# Allegro board CyberBalance.brd
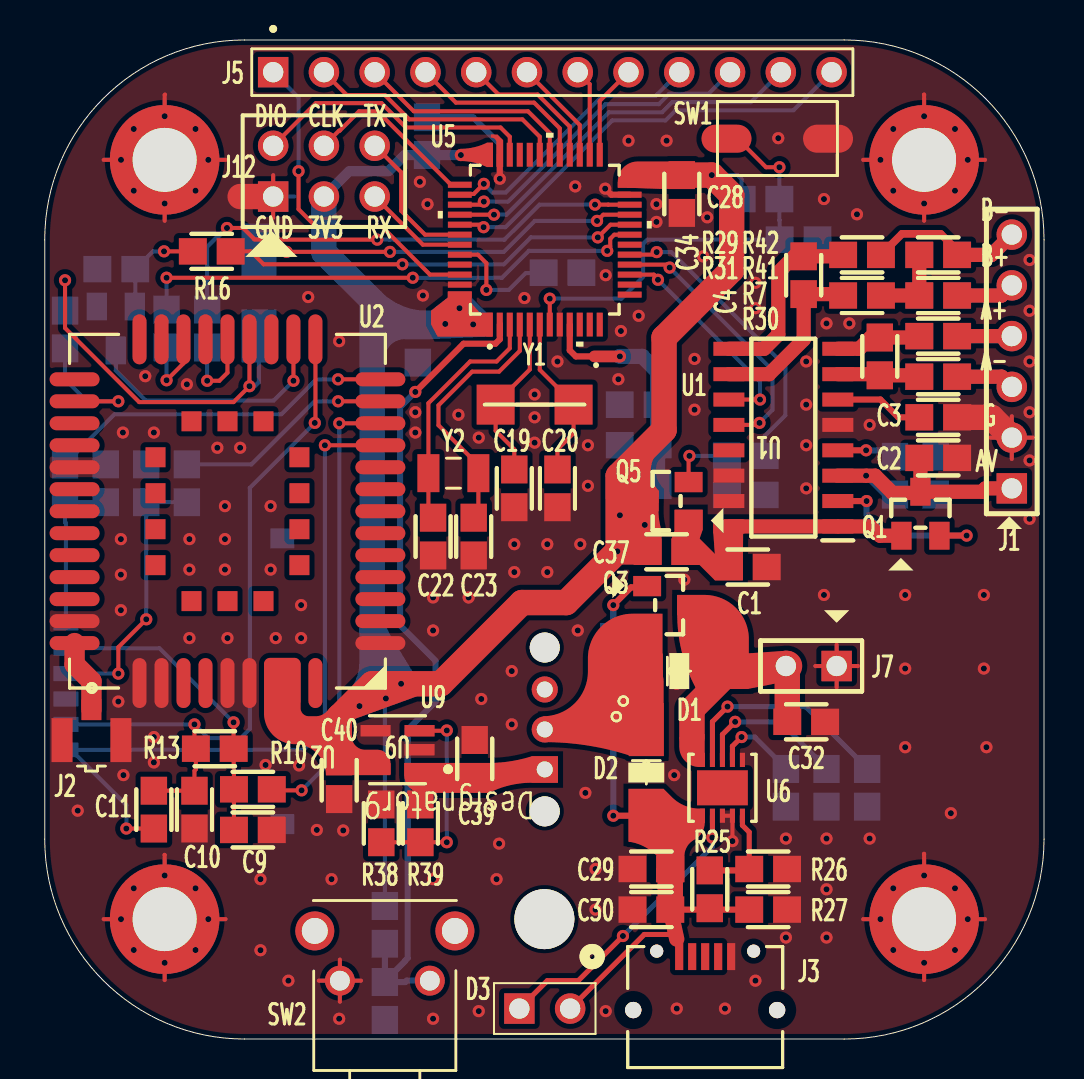
[diagram p0: board, top side]
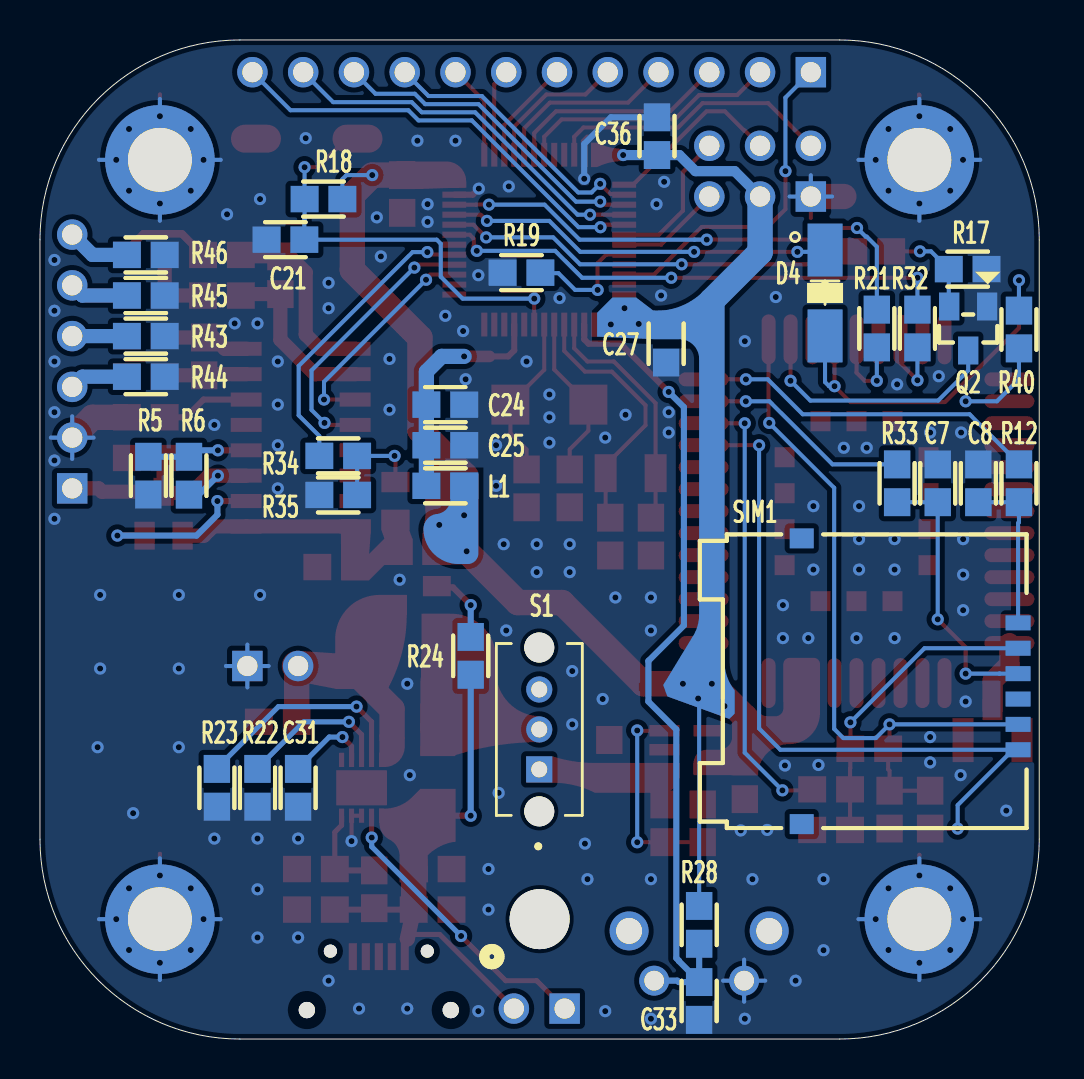
[diagram p1: board, bottom side, seen from below]

Outline 50 x 50 mm; copper layers: TOP, BOTTOM. Coordinates in mm from the lower left corner of the outline.
Outline path: 0,40 0,10 arc(2.93,2.93) 10,0 40,0 arc(47.07,2.93) 50,10 50,40 arc(47.07,47.07) 40,50 10,50 arc(2.93,47.07) 0,40

## Design rules (mm)
constraint set DEFAULT: min track width 0.203

## Placement (name value [footprint] x y rotation side)
C1  10u  [C0805_ROLA]  35.18 23.62 180 top
C2  10u  [C0805_ROLA]  44.7 29.08 180 top
C3  0.1u  [C0805_ROLA]  44.7 31.11 0 top
C4  0.1u  [C0805_ROLA]  41.78 34.16 90 top
C7  30p  [C0805_ROLA]  5.08 27.81 270 bottom
C8  30p  [C0805_ROLA]  3.05 27.81 270 bottom
C9  30p  [C0805_ROLA]  10.41 10.46 180 top
C10  30p  [C0805_ROLA]  7.49 11.48 90 top
C11  100n  [C0805_ROLA]  5.46 11.48 90 top
C19  12p  [C0805_ROLA]  23.5 27.56 270 top
C20  12p  [C0805_ROLA]  25.65 27.56 270 top
C21  1n  [C0805_ROLA]  37.72 40.01 0 bottom
C22  20p  [C0805_ROLA]  19.43 25.15 270 top
C23  20p  [C0805_ROLA]  21.46 25.15 270 top
C24  100n  [C0805_ROLA]  29.72 31.75 0 bottom
C25  1u  [C0805_ROLA]  29.72 29.72 0 bottom
C27  100n  [C0805_ROLA]  18.67 34.8 90 bottom
C28  100n  [C0805_ROLA]  31.88 42.29 90 top
C29  0.1u  [C0805_ROLA]  30.35 8.51 0 top
C30  10u  [C0805_ROLA]  30.35 6.48 0 top
C31  0.1u  [C0805_ROLA]  37.08 12.57 90 bottom
C32  10u  [C0805_ROLA]  38.1 15.88 180 top
C33  1n  [C0805_ROLA]  17.02 1.91 90 bottom
C34  0.1u  [C0805_ROLA]  37.97 38.23 270 top
C36  100n  [C0805_ROLA]  19.13 45.19 270 bottom
C37  100n  [C0805_ROLA]  31.11 24.38 0 top
C39  1u  [C0805_ROLA]  21.51 14.02 90 top
C40  1u  [C0805_ROLA]  14.73 12.95 270 top
D1  D1N5819  [DO214]  31.75 18.41 180 top
D2  D1N5819  [DO214]  30.1 13.34 90 top
D3  RED  [LED_3MM_ROLA]  25.02 1.52 0 top
D4  D1N5819  [DO214]  10.72 37.34 90 bottom
J1  CON6  [HDR_1X6_ROLA]  48.39 27.56 90 top
J2  20279-001E-01  [IPEX_20279-001E-01]  2.34 14.96 90 top
J3  MicroUSB  [ZX62D-B-5P8_30__HIR]  33.05 1.6 0 top
J5  LCD  [TE_103336-5]  25.4 48.39 0 top
J7  BAT  [HDR_1X2_ROLA]  39.62 18.67 180 top
J8  CON1  [MHOLE_32MM_ROLA]  6 6 0 top
J9  CON1  [MHOLE_32MM_ROLA]  44 6 0 top
J10  CON1  [MHOLE_32MM_ROLA]  6 44 0 top
J11  CON1  [MHOLE_32MM_ROLA]  44 44 0 top
J12  CON6A  [HEADER_3X2_100MIL]  11.43 42.16 0 top
L1  Ferrite  [R0805_ROLA]  29.72 27.69 180 bottom
NOREF  -  []  22.5 0.1 0 top
NOREF#2  -  []  15.2 -4.1 0 top
NOREF#3  -  []  29.3 -1.7 0 top
NOREF#4  -  []  0 0.1 0 top
NOREF#5  -  [unnamed#2]  25 6 0 top
NOREF#6  -  []  0 0 90 top
NOREF#7  -  []  37.7 -1.3 90 top
NOREF#8  -  []  0 50 0 top
NOREF#9  -  []  25 0 90 top
NOREF#10  -  []  13.3 -3.8 90 top
NOREF#11  -  []  27.3 11.1 90 top
Q1  SS8550  [SOT23_ROLA]  43.81 26.29 0 top
Q2  SS8050  [SOT23_ROLA]  3.56 35.56 0 bottom
Q3  AO3401A  [SOT23_ROLA]  31.24 21.72 270 top
Q5  AO3415  [SOT23_ROLA]  31.11 26.92 90 top
R5  8.2k  [R0805_ROLA]  44.58 28.19 90 bottom
R6  12k  [R0805_ROLA]  42.55 28.19 90 bottom
R7  1k  [R0805_ROLA]  44.7 35.18 180 top
R10  22  [R0805_ROLA]  10.41 12.5 0 top
R12  22  [R0805_ROLA]  1.02 27.81 90 bottom
R13  47k  [R0805_ROLA]  8.51 14.53 0 top
R16  10k  [R0805_ROLA]  8.36 39.42 180 top
R17  51k  [R0805_ROLA]  3.58 38.53 0 bottom
R18  1k  [R0805_ROLA]  35.81 42.04 180 bottom
R19  100K  [R0805_ROLA]  25.91 38.35 0 bottom
R21  1k  [R0805_ROLA]  8.13 35.56 90 bottom
R22  33k  [R0805_ROLA]  39.12 12.57 90 bottom
R23  4.7k  [R0805_ROLA]  41.15 12.57 90 bottom
R24  4.7k  [R0805_ROLA]  28.45 19.18 90 bottom
R25  510k  [R0805_ROLA]  33.27 7.49 90 top
R26  100K  [R0805_ROLA]  36.2 8.51 180 top
R27  10k  [R0805_ROLA]  36.2 6.48 0 top
R28  1k  [R0805_ROLA]  17.02 5.71 270 bottom
R29  1k  [R0805_ROLA]  40.89 39.24 180 top
R30  1k  [R0805_ROLA]  44.7 33.15 180 top
R31  1k  [R0805_ROLA]  40.89 37.21 180 top
R32  1k  [R0805_ROLA]  6.1 35.56 90 bottom
R33  22  [R0805_ROLA]  7.11 27.81 90 bottom
R34  1k  [R0805_ROLA]  35.08 29.18 180 bottom
R35  100K  [R0805_ROLA]  35.08 27.23 0 bottom
R38  68k/NC  [R0805_ROLA]  16.84 10.79 90 top
R39  300k/FB  [R0805_ROLA]  18.8 10.79 90 top
R40  20k  [R0805_ROLA]  1.02 35.51 270 bottom
R41  0  [R0805_ROLA]  44.7 37.21 180 top
R42  NC  [R0805_ROLA]  44.7 39.24 180 top
R43  NC  [R0805_ROLA]  44.7 35.18 180 bottom
R44  NC  [R0805_ROLA]  44.7 33.15 180 bottom
R45  NC  [R0805_ROLA]  44.7 37.21 180 bottom
R46  NC  [R0805_ROLA]  44.7 39.24 180 bottom
S1  OS102011MS2QN1  [SW_OS102011MS2QN1]  25.02 15.49 90 bottom
SIM1  SIM_CARD  [GCT_SIM7200-6-0-18-00-X_REV]  3.81 17.91 90 bottom
SW1  SW PUSHBUTTON  [PUSHBUTTON_ROLA]  36.65 45.06 0 top
SW2  SW PUSHBUTTON  [SW_1-1825027-1]  17.02 2.92 0 top
U1  HX711  [SOIC127P600X160-16N]  36.96 30.1 180 top
U2  -  [BC26]  9.14 26.42 180 top
U5  STM32L053C6  [LQFP48-7X7MM]  25.02 40.01 90 top
U6  MP26028EQ  [IC10_MP26028_MNP-L]  33.91 12.57 90 top
U9  TPS7A2033PDBVR  [DBV0005A-IPC_B]  17.65 14.48 180 top
Y1  8M  [OSC5032S2PIN_ROLA]  24.51 31.75 270 top
Y2  32.768k  [XTAL_ABS07-32768KHZ-T]  20.45 28.32 180 top

## Library data of the parts
C1-C4 C7-C11 C19-C25 C27-C34 C36 C37 C39 C40 = C
D1 D2 D4 = D1N5819_1
D3 = LED
J1 = CON6
J2 = 20279-001E-01
J3 = MicroUSB_1: User Part Number: PN; Tolerance: TOL
J5 = CON12
J7 = CON2
J8-J11 = CON1
J12 = CON6A
L1 = L
Q1 = SS8550
Q2 = SS8050
Q3 = AO3401A
Q5 = MOSFET_EP_DGS
R5-R7 R10 R12 R13 R16-R19 R21-R35 R38-R46 = R
S1 = OS102011MS2QN1
SIM1 = SIM_CARD
SW1 SW2 = SW PUSHBUTTON
U1 = HX711_0
U2 = BC26_0
U5 = STM32L053C6T6: User Part Number: PN; Tolerance: TOL
U6 = MP26028EQ_0: User Part Number: PN; Tolerance: TOL
U9 = TPS7A2033PDBVR_0: User Part Number: PN; Tolerance: TOL
Y1 Y2 = CRYSTAL

## Footprints (pads in the part's own frame, mm; a bottom-side part is the same pattern mirrored in y, then rotated)
BC26
  oval 2.5x0.7 smd: 1(-7.65,6.6) 2(-7.65,5.5) 3(-7.65,4.4) 4(-7.65,3.3) 5(-7.65,2.2) 6(-7.65,1.1) 7(-7.65,0) 8(-7.65,-1.1) 9(-7.65,-2.2) 10(-7.65,-3.3) 11(-7.65,-4.4) 12(-7.65,-5.5) 13(-7.65,-6.6) 23(7.65,-6.6) 24(7.65,-5.5) 25(7.65,-4.4) 26(7.65,-3.3) 27(7.65,-2.2) 28(7.65,-1.1) 29(7.65,0) 30(7.65,1.1) 31(7.65,2.2) 32(7.65,3.3) 33(7.65,4.4) 34(7.65,5.5) 35(7.65,6.6)
  oval 0.7x2.5 smd: 14(-4.4,-8.6) 15(-3.3,-8.6) 16(-2.2,-8.6) 17(-1.1,-8.6) 18(0,-8.6) 19(1.1,-8.6) 20(2.2,-8.6) 21(3.3,-8.6) 22(4.4,-8.6) 36(4.4,8.6) 37(3.3,8.6) 38(2.2,8.6) 39(1.1,8.6) 40(0,8.6) 41(-1.1,8.6) 42(-2.2,8.6) 43(-3.3,8.6) 44(-4.4,8.6)
  rect 1x1 smd: 45(-3.6,2.7) 46(-3.6,0.9) 47(-3.6,-0.9) 48(-3.6,-2.7) 49(-1.8,-4.5) 50(0,-4.5) 51(1.8,-4.5) 52(3.6,-2.7) 53(3.6,-0.9) 54(3.6,0.9) 55(3.6,2.7) 56(1.8,4.5) 57(0,4.5) 58(-1.8,4.5)
C0805_ROLA
  rect 1.397x1.321 smd: 1(-0.946,0) 2(0.946,0)
DBV0005A-IPC_B
  rect 1.505x0.572 smd: 1(-1.101,0.95) 2(-1.101,0) 3(-1.101,-0.95) 4(1.101,-0.95) 5(1.101,0.95)
DO214
  rect 2.65x1.75 smd: ANODE(-2.15,0) CATHODE(2.15,0)
GCT_SIM7200-6-0-18-00-X_REV
  rect 1x1.2 smd: (-7.15,8.075) (7.15,8.075)
  rect 0.75x1.25 smd: C1(-2.16,-2.75) C2(0.38,-2.75) C3(2.92,-2.75) C5(-3.43,-2.75) C6(-0.89,-2.75) C7(1.65,-2.75)
HDR_1X2_ROLA
  rect 1.524x1.524 hole 1.016: 1(0,0)
  round 1.524 hole 1.016: 2(2.54,0)
HDR_1X6_ROLA
  rect 1.524x1.524 hole 1.016: 1(0,0)
  round 1.524 hole 1.016: 2(2.54,0) 3(5.08,0) 4(7.62,0) 5(10.16,0) 6(12.7,0)
HEADER_3X2_100MIL
  rect 1.524x1.524 hole 1.016: 1(0,0)
  round 1.524 hole 1.016: 2(2.54,0) 3(5.08,0) 4(5.08,2.54) 5(2.54,2.54) 6(0,2.54)
IC10_MP26028_MNP-L
  rect 1.753x2.54 smd: (0,0)
  rect 0.711x0.254 smd: 1(-1.397,1) 2(-1.397,0.5) 3(-1.397,0) 4(-1.397,-0.5) 5(-1.397,-1) 6(1.397,-1) 7(1.397,-0.5) 8(1.397,0) 9(1.397,0.5) 10(1.397,1)
IPEX_20279-001E-01
  rect 1.05x1 smd: 1(1.525,0)
  rect 2.2x1.05 smd: 2(0,1.475) 3(0,-1.475)
LED_3MM_ROLA
  rect 1.524x1.524 hole 1.016: 1(-1.27,0)
  round 1.524 hole 1.016: 2(1.27,0)
LQFP48-7X7MM
  rect 1.194x0.305 smd: 1(-4.25,2.75) 2(-4.25,2.25) 3(-4.25,1.75) 4(-4.25,1.25) 5(-4.25,0.75) 6(-4.25,0.25) 7(-4.25,-0.25) 8(-4.25,-0.75) 9(-4.25,-1.25) 10(-4.25,-1.75) 11(-4.25,-2.25) 12(-4.25,-2.75) 25(4.25,-2.75) 26(4.25,-2.25) 27(4.25,-1.75) 28(4.25,-1.25) 29(4.25,-0.75) 30(4.25,-0.25) 31(4.25,0.25) 32(4.25,0.75) 33(4.25,1.25) 34(4.25,1.75) 35(4.25,2.25) 36(4.25,2.75)
  rect 0.305x1.194 smd: 13(-2.75,-4.25) 14(-2.25,-4.25) 15(-1.75,-4.25) 16(-1.25,-4.25) 17(-0.75,-4.25) 18(-0.25,-4.25) 19(0.25,-4.25) 20(0.75,-4.25) 21(1.25,-4.25) 22(1.75,-4.25) 23(2.25,-4.25) 24(2.75,-4.25) 37(2.75,4.25) 38(2.25,4.25) 39(1.75,4.25) 40(1.25,4.25) 41(0.75,4.25) 42(0.25,4.25) 43(-0.25,4.25) 44(-0.75,4.25) 45(-1.25,4.25) 46(-1.75,4.25) 47(-2.25,4.25) 48(-2.75,4.25)
MHOLE_32MM_ROLA
  round 5.486 hole 3.2: 1(0,0)
OSC5032S2PIN_ROLA
  rect 2x1.9 smd: 1(0,1.95) 2(0,-1.95)
PUSHBUTTON_ROLA
  oval 2.5x1.4 smd: 1(-2.54,0) 2(2.54,0)
R0805_ROLA
  rect 1.397x1.321 smd: 1(-0.946,0) 2(0.946,0)
SOIC127P600X160-16N
  rect 1.55x0.7 smd: 1(-2.725,4.445) 2(-2.725,3.175) 3(-2.725,1.905) 4(-2.725,0.635) 5(-2.725,-0.635) 6(-2.725,-1.905) 7(-2.725,-3.175) 8(-2.725,-4.445) 9(2.725,-4.445) 10(2.725,-3.175) 11(2.725,-1.905) 12(2.725,-0.635) 13(2.725,0.635) 14(2.725,1.905) 15(2.725,3.175) 16(2.725,4.445)
SOT23_ROLA
  rect 1.016x1.397 smd: 1(-0.95,-1.1) 2(0.95,-1.1) 3(0,1.1)
SW_1-1825027-1
  round 1.95 hole 1.3: (-3.505,2.49) (3.505,2.49)
  round 1.498 hole 0.99: 1(-2.25,0) 2(2.25,0)
SW_OS102011MS2QN1
  round 1.5 hole 1.5 unplated: (-4.1,0) (4.1,0)
  rect 1.308x1.308 hole 0.8: 1(-2,0)
  round 1.308 hole 0.8: 2(0,0) 3(2,0)
TE_103336-5
  rect 1.524x1.524 hole 1.016: 1(-13.97,0)
  round 1.524 hole 1.016: 2(-11.43,0) 3(-8.89,0) 4(-6.35,0) 5(-3.81,0) 6(-1.27,0) 7(1.27,0) 8(3.81,0) 9(6.35,0) 10(8.89,0) 11(11.43,0) 12(13.97,0)
unnamed#2
  round 3 hole 3 unplated: (0,0)
XTAL_ABS07-32768KHZ-T
  rect 1.1x1.9 smd: 1(-1.25,0) 2(1.25,0)
ZX62D-B-5P8_30__HIR
  round 0.813 hole 1.499: (-3.6,-0.15) (3.6,-0.15)
  round 0.65 hole 0.85: (-2.425,2.799) (2.425,2.799)
  rect 0.406x1.346 smd: 1(-1.3,2.525) 2(-0.65,2.525) 3(0,2.525) 4(0.65,2.525) 5(1.3,2.525)

## Nets
3V3: C27.2 C28.2 C36.2 C37.1 C40.1 J12.2 L1.2 Q5.3(S) R18.2 R28.1 U2.42 U2.43 U5.1 U5.24 U5.36 U5.48 U9.5
3V3_HX: C1.2 C37.2 Q1.1(E) Q5.1 U1.1 U1.16
AVDD: C2.2 J1.1 Q1.3 R6.1 U1.3
GND: C1.1 C2.1 C3.2 C7.1 C8.1 C9.1 C10.1 C19.2 C20.2 C21.2 C22.2 C23.2 C24.1 C25.1 C27.1 C28.1 C29.1 C30.1 C31.1 C32.1 C33.1 C36.1 C39.2 C40.2 J1.2 J2.2 J2.3 J3.5 J7.1 J8.1 J9.1 J10.1 J11.1 J12.1 Q2.1(E) R5.1 R17.1 R19.2 R22.1 R23.1 R26.1 R27.2 R35.2 R38.2 R43.2 R44.2 R45.2 R46.2 SW1.2 SW2.1 U1.5 U1.14 U1.15 U2.1 U2.27 U2.34 U2.36 U2.37 U2.40 U2.41 U5.8 U5.23 U5.35 U5.47 U6.3 U6.4 U6.6 U9.2 U9.4
VCC: C39.1 R39.2 S1.1 U9.1(VIN)
VDD_EXT: R40.2 U2.24
VDDA: C24.2 C25.2 L1.1 U5.9
VIN: D1.CATHODE(2) D2.CATHODE(2) Q3.2(S) S1.2
A+: J1.4 R7.1 R43.1
A-: J1.3 R30.1 R44.1
B+: J1.5 R41.1 R45.1
B++: R31.1 R41.2 R42.2
B-: J1.6 R29.1 R42.1 R46.1
BAT+: C32.2 D1.ANODE J7.2 Q3.3 U6.10
BC28_EINT: R32.2 U5.19
BC28_RI: R32.1 U2.20
BC28_RST: R16.1 U5.20
BC28_RXD: D4.ANODE R40.1 U2.17
BC28_TXD: R21.1 U2.18
HX_EN: R34.1 U5.17
INB+: C34.2 R31.2 U1.10
INB-: C34.1 R29.2 U1.9
LCD_COM0: J5.4 U5.29
LCD_COM1: J5.3 U5.30
LCD_COM2: J5.2 U5.31
LCD_COM3: J5.1 U5.46
LCD_SEG7: J5.10 U5.39
LCD_SEG8: J5.11 U5.40
LCD_SEG9: J5.12 U5.41
LCD_SEG12: J5.8 U5.25
LCD_SEG13: J5.7 U5.26
LCD_SEG14: J5.6 U5.27
LCD_SEG15: J5.5 U5.28
LCD_SEG17: J5.9 U5.38
LPUART1_RX: R21.2 U5.22
LPUART1_TX: D4.CATHODE(2) U5.21
NRST: C21.1 R18.1 SW1.1 U5.7
OSC32_IN: C22.1 U5.3 Y2.2
OSC32_OUT: C23.1 U5.4 Y2.1
OSC_IN: C19.1 U5.5 Y1.2
OSC_OUT: C20.1 U5.6(PH1-OSC_OUT) Y1.1
RESET: Q2.3 U2.15
SIM_CLK: R12.2 U2.13
SIM_DATA: R10.2 U2.11
SIM_GND: C11.1 SIM1.C5 U2.10
SIM_RST: R33.2 U2.12
SIM_VCC: C10.2 C11.2 R13.1 SIM1.C1 U2.14
SPI1_MISO: U1.12 U5.16
SPI1_SCK: U1.11 U5.15
SWCLK: J12.5 U5.37
SWDIO: J12.6 U5.34
USART1_RX: J12.3 U5.43
USART1_TX: J12.4 U5.42
WAKEUP: C33.2 R28.2 SW2.2 U5.2
N00780: Q1.2 U1.2
N00907: R5.2 R6.2 U1.4
N01187: C3.1 U1.6
N01191: C4.1 R30.2 U1.7
N03977: C7.2 R33.1 SIM1.C2
N04018: C9.2 R10.1 R13.2 SIM1.C7
N04137: C8.2 R12.1 SIM1.C3
N05893: Q2.2 R16.2 R17.2
N19720: Q3.1 R24.2
N19854: C29.2 C30.2 D2.ANODE D3.2 J3.1(VBUS) R24.1 R25.1 R27.1 U6.1
N20221: R25.2 R26.2 U6.5(VBIAS)
N20337: C31.2 U6.7
N20363: R22.2 U6.8
N20370: R23.2 U6.9
N32203: C4.2 R7.2 U1.8
N44314: Q5.2 R34.2 R35.1
N62418: D3.1(CATHODE) U6.2
N71350: J2.1(SIG) U2.35
N79431: R38.1 R39.1 U9.3
N0822037: R19.1 U5.44

Pads without a net: J3 2 3 4; S1 3; SIM1 C6; U1 13; U2 2 3 4 5 6 7 8 9 16 19 21 22 23 25 26 28 29 30 31 32 33 38 39 44 45 46 47 48 49 50 51 52 53 54 55 56 57 58; U5 10 11 12 13 14 18 32 33 45

## Via types
v1: diameter 0.61, hole 0.305, TOP to BOTTOM, 228 vias

## Routing (per net, layer and track width the routed paths; a pad name or vN(x,y) marks a point on that pad's centre or on a via; arc(x,y) is an arc through that point)
3V3: length 90.3
  TOP w1.27: C40.1 14.73,16.13 v1(16.38,17.78) v1(17.83,17.78) 19.81,17.78 23.88,21.84 26.09,21.84 28.63,24.38 ; 28.63,24.38 C37.1 ; 28.63,24.38 28.7,24.45 28.7,28.19 30.99,30.48 30.99,35.1 34.37,38.49 34.37,42.24 v1(33.38,43.24) C28.2 31.5,43.24
  BOTTOM w0.203: v1(33.38,43.24) 34.66,43.24 34.87,43.03 R18.2 ; R28.1 17.02,16.64
  BOTTOM w0.508: J12.2 15.24,43.43 17.2,43.43 18.01,44.24 C36.2 v1(20.82,44.24)
  BOTTOM w1.27: J12.2 13.97,39.37 16.38,36.96 v1(16.38,17.78)
  vias: v1(15.75,16.66) v1(17.07,17.04) v1(20.04,35.79) v1(20.75,36.58) v1(21.44,35.76) v1(28.65,24.41) v1(28.78,26.21) v1(30.02,25.73)
3V3_HX: length 8.8
  TOP w0.711: U1.16 U1.1 41.33,25.65 41.8,25.19 Q1.1
AVDD: length 12.7
  TOP w0.711: C2.2 43.81,29.03 Q1.3 ; Q1.3 43.76,27.33 42.42,27.33 41.55,28.19 v1(41.1,28.19) U1.3 ; Q1.3 46.9,27.39 47.07,27.56 J1.1
  BOTTOM w0.305: R6.1 42.04,27.25 v1(41.1,28.19)
GND: length 144.4
  TOP w0.203: 6,40.95 J10.1 ; J10.1 2.95,44 ; J10.1 v1(6,46.18) 6,47.25 6.02,47.27 ; J10.1 9.05,44 ; SW2.1 15.82,2.92 ; SW2.1 13.71,2.92 ; SW2.1 14.77,3.98 ; SW2.1 14.77,1.87 ; 11.43,41.1 J12.1 11.43,43.23 ; J9.1 v1(44,8.18) 44,9.26 43.99,9.27 ; J9.1 40.95,6 ; J9.1 47.05,6 ; J9.1 44,2.95 ; J7.1 39.62,19.74 ; J7.1 38.56,18.67 ; J7.1 39.62,17.6 ; J7.1 40.69,18.67 ; J11.1 47.05,44 ; J11.1 v1(44,46.18) 44,47.26 43.99,47.27 ; J11.1 40.95,44 ; J11.1 44,40.95 ; v1(34.41,9.91) U6.4 U6.3 ; 48.39,29.03 J1.2 ; J1.2 47.32,30.1 ; J1.2 49.45,30.1 ; J1.2 48.39,31.17 ; 5.99,9.22 6,9.21 v1(6,8.18) J8.1 ; J8.1 9.05,6 ; J8.1 6,2.95 ; J8.1 2.95,6
  TOP w0.305: U5.35 v1(22.77,43.05) 22.81,43.05 ; U5.23 28.35,42.25 v1(28.04,42.56)
  TOP w1.27: J12.1 9.78,42.16 ; J1.2 47.37,31.11 C3.2
  BOTTOM w0.203: J10.1 9.05,44 ; J10.1 6,40.95 ; J10.1 2.95,44 ; J10.1 6,47.05 ; SW2.1 15.82,2.92 ; SW2.1 13.71,2.92 ; SW2.1 14.77,3.98 ; SW2.1 14.77,1.87 ; J7.1 40.69,18.67 ; J7.1 38.56,18.67 ; J7.1 39.62,17.6 ; J7.1 39.62,19.74 ; J11.1 47.05,44 ; J11.1 44,47.05 ; J11.1 44,40.95 ; J11.1 40.95,44 ; 10.36,42.16 J12.1 ; J12.1 12.5,42.16 ; J12.1 11.43,43.23 ; 6,2.95 J8.1 ; J8.1 9.05,6 ; J8.1 6,9.05 ; J8.1 2.95,6 ; 47.32,30.1 J1.2 ; J1.2 49.45,30.1 ; J1.2 48.39,31.17 ; J1.2 48.39,29.03 ; J9.1 44,9.05 ; J9.1 44,2.95 ; J9.1 47.05,6 ; J9.1 40.95,6
  BOTTOM w0.305: v1(22.77,43.05) 22.77,44.79 21.43,46.13 C36.1
  vias: v1(1.65,11.43) v1(3.68,16.89) v1(3.82,44) v1(3.81,25.02) v1(3.81,23.24) v1(3.81,21.46) v1(3.82,6) v1(3.91,30.35) v1(3.94,13.21) v1(4.46,45.54) v1(4.46,42.46) v1(4.46,7.54) v1(4.46,4.46) v1(5.03,33.17) v1(5.46,30.35) v1(5.46,15.11) v1(5.46,13.84) v1(6,41.82) v1(6,3.82) v1(7.11,32.77) v1(7.24,25.02) v1(7.24,23.5) v1(7.24,20.07) v1(7.54,45.54) v1(7.54,42.46) v1(7.54,7.54) v1(7.54,4.46) v1(8.18,44) v1(8.18,6) v1(8.64,29.59) v1(9.02,26.67) v1(9.02,25.02) v1(9.02,23.5) v1(9.14,20.07) v1(9.78,29.59) v1(10.79,8) v1(10.79,4.45) v1(11.05,13.72) v1(11.3,26.67) v1(11.3,23.5) v1(11.56,20.07) v1(12.19,2.92) v1(12.73,13.69) v1(12.83,21.72) v1(12.83,20.07) v1(13.18,37.13) v1(13.61,10.46) v1(14.35,8) v1(14.73,34.92) v1(14.73,1.02) v1(14.94,10.44) v1(18.54,31.37) v1(18.54,30.35) v1(18.77,42.9) v1(18.92,37.21) v1(19.15,41.78) v1(19.43,22.1) v1(19.43,20.45) v1(19.43,8) v1(19.43,1.02) v1(20.7,31.24) v1(21.21,22.1) v1(21.72,30.1) v1(21.72,1.4) v1(21.84,17.02) v1(22.61,8) v1(22.73,9.78) v1(23.37,18.41) v1(23.37,15.75) v1(23.5,24.77) v1(23.5,23.37) v1(24,37.08) v1(24.51,32.26) v1(24.51,31.11) v1(24.51,29.84) v1(25.15,24.77) v1(25.15,23.37) v1(25.65,33.91) v1(26.54,42.67) v1(26.67,20.45) v1(26.8,24.77) v1(27.05,12.32) v1(27.18,29.72) v1(27.18,27.69) v1(27.56,8.51) v1(27.56,6.48) v1(28.07,38.23) v1(28.07,1.4) v1(28.7,33.02) v1(28.83,35.43) v1(29.21,44.96) v1(29.72,36.2) v1(30.61,41.78) v1(30.61,40.89) v1(31.11,44.96) v1(31.5,13.21) v1(31.62,17.78) v1(31.62,1.52) v1(32,22.99) v1(32.51,34.04) v1(32.51,31.5) v1(32.94,39.17) v1(33.15,41.12) v1(34.04,1.52) v1(35.56,37.85) v1(35.56,36.58) v1(35.56,2.92) v1(36.7,45.09) v1(37.08,10.03) v1(37.08,5.08) v1(38.1,33.91) v1(38.1,31.75) v1(38.1,29.72) v1(38.1,27.56) v1(38.99,42.04) v1(38.99,22.23) v1(39.12,35.81) v1(39.12,10.03) v1(39.12,7.49) v1(39.12,5.08) v1(40.26,35.81) v1(40.64,41.27) v1(41.27,30.73) v1(41.27,10.03) v1(41.82,44) v1(41.82,6) v1(42.46,45.54) v1(42.46,42.46) v1(42.46,7.54) v1(42.46,4.46) v1(43.05,22.23) v1(43.05,18.54) v1(43.05,14.61) v1(44,41.82) v1(44,3.82) v1(45.34,11.3) v1(45.54,45.54) v1(45.54,42.46) v1(45.54,7.54) v1(45.54,4.46) v1(46.18,44) v1(46.18,6) v1(46.99,22.23) v1(46.99,18.54) v1(47.12,14.61) v1(49.28,38.99) v1(49.28,36.45) v1(49.28,33.91) v1(49.28,31.37) v1(49.28,28.96) v1(49.28,26.04)
VCC: length 1.8
  TOP w0.203: U9.1 18.75,12.79 18.8,12.74 R39.2
VDD_EXT: length 6.9
  TOP w0.203: U2.24 v1(3.68,31.92)
  BOTTOM w0.203: v1(3.68,31.92) 2.12,31.92 1.02,33.02 R40.2 1.02,34.61
VDDA: length 11.8
  TOP w0.305: 27.51,34.16 26.57,34.16 26.27,34.47 U5.9
  TOP w0.584: v1(28.78,34.16) 27.51,34.16
  BOTTOM w0.762: v1(28.78,34.16) 29.9,34.16 30.66,33.4 C24.2 C25.2 L1.1
VIN: length 2.4
  TOP w1.727: D2.CATHODE 30.1,17.92
A+: length 5.5
  TOP w0.711: R7.1 J1.4
  BOTTOM w0.711: J1.4 R7.1
A-: length 5.9
  TOP w0.711: J1.3 47.88,33.15 R30.1
  BOTTOM w0.711: R30.1 47.88,33.15 J1.3
B+: length 5.9
  TOP w0.711: R41.1 47.88,37.21 J1.5
  BOTTOM w0.711: J1.5 47.88,37.21 R41.1
B++: length 3.9
  TOP w0.711: R31.1 R41.2 R42.2
B-: length 11.1
  TOP w0.381: R29.1 42.89,40.3 44.83,40.3 45.65,39.47 R42.1
  TOP w0.711: J1.6 47.37,39.24 R42.1
  BOTTOM w0.711: R42.1 47.37,39.24 J1.6
BAT+: length 6.4
  TOP w1.27: C32.2 37.15,18.6 J7.2 ; 32.38,15.11 32.38,16.51 33.9,18.03
BC28_EINT: length 25.9
  TOP w0.203: v1(18.41,38.1) v1(6.1,38.1) ; U5.19 28.5,40.25 28.3,40.05 28.3,39.67 28.14,39.52 v1(28.14,39.45)
  BOTTOM w0.203: v1(18.41,38.1) 22.88,38.1 24.22,39.45 v1(28.14,39.45) ; v1(6.1,38.1) R32.2
BC28_RI: length 4
  TOP w0.203: v1(6.1,32.97) 6.94,33.82 U2.20
  BOTTOM w0.203: R32.1 v1(6.1,32.97)
BC28_RST: length 21.1
  TOP w0.203: v1(27.67,40.12) 28.31,40.76 U5.20 ; v1(17.9,38.77) 10.95,38.77 10.31,39.42 R16.1
  BOTTOM w0.203: v1(27.67,40.12) 24.32,40.12 22.97,38.77 v1(17.9,38.77)
BC28_RXD: length 20.2
  TOP w0.203: U2.17 v1(10.24,32.67) 9.45,31.88 4.72,31.88 1.02,35.59 v1(1.02,37.97)
  BOTTOM w0.203: R40.1 v1(1.02,37.97) ; D4.ANODE 10.72,32.88 10.52,32.67 v1(10.24,32.67)
BC28_TXD: length 4.5
  TOP w0.203: U2.18 9.14,33.35 8.74,32.94 v1(8.13,32.94)
  BOTTOM w0.203: R21.1 v1(8.13,32.94)
HX_EN: length 15.1
  TOP w0.203: U5.17 30.49,39.25 v1(30.62,39.38)
  BOTTOM w0.203: R34.1 36.02,30.18 37.05,31.21 37.05,33.68 31.36,39.38 v1(30.62,39.38)
INB+: length 8.7
  TOP w0.711: R31.2 39.88,37.28 C34.2 37.97,35 36.24,33.27 U1.10
INB-: length 9.5
  TOP w0.711: R29.2 39.88,39.17 C34.1 37.51,39.17 36.7,38.37 36.7,35.26 35.99,34.54 U1.9
LCD_COM0: length 9.2
  TOP w0.203: J5.4 20.57,46.86 24.49,46.86 25.77,45.58 U5.29
LCD_COM1: length 11.1
  TOP w0.203: U5.30 25.27,45.34 24.18,46.43 18.47,46.43 J5.3
LCD_COM2: length 13
  TOP w0.203: J5.2 15.11,47.24 17.02,47.24 18.24,46.02 23.9,46.02 24.77,45.16 U5.31
LCD_COM3: length 16.8
  TOP w0.203: U5.46 19.28,38.25 16.89,40.64 13.59,40.64 12.7,41.53 v1(12.7,43.43)
  BOTTOM w0.203: J5.1 12.7,47.12 v1(12.7,43.43)
LCD_SEG7: length 16.3
  TOP w0.203: U5.39 21.82,41.76 v1(21.97,41.91)
  BOTTOM w0.203: v1(21.97,41.91) 23.18,41.91 28.06,46.79 30.72,46.79 31.25,47.31 33.21,47.31 J5.10
LCD_SEG8: length 19
  TOP w0.203: v1(22.48,41.25) U5.40
  BOTTOM w0.203: v1(22.48,41.25) 23.1,41.25 28.23,46.38 30.89,46.38 31.4,46.89 35.33,46.89 J5.11
LCD_SEG9: length 21.9
  TOP w0.203: U5.41 21.83,40.76 v1(21.96,40.63)
  BOTTOM w0.203: v1(21.96,40.63) 23.05,40.63 28.39,45.97 31.06,45.97 31.57,46.48 37.47,46.48 J5.12
LCD_SEG12: length 4.7
  TOP w0.203: J5.8 27.77,46.95 U5.25
LCD_SEG13: length 4.4
  TOP w0.203: J5.7 27.27,47.79 U5.26
LCD_SEG14: length 5.2
  TOP w0.203: U5.27 26.77,45.75 J5.6
LCD_SEG15: length 7.2
  TOP w0.203: J5.5 22.71,47.27 24.66,47.27 26.27,45.66 U5.28
LCD_SEG17: length 13.9
  TOP w0.203: U5.38 20.81,42.29 21.46,42.29 v1(21.97,42.8)
  BOTTOM w0.203: v1(21.97,42.8) 22.4,42.37 23.06,42.37 27.89,47.19 30.56,47.19 J5.9
LPUART1_RX: length 25.6
  TOP w0.203: U5.22 28.2,41.76 28.19,41.76 v1(27.53,41.76) ; v1(16.64,40.01) 11.23,40.01 11.21,40.02 10.5,40.02 9.92,40.59 v1(9.12,40.59)
  BOTTOM w0.203: v1(16.64,40.01) 17.25,40.01 17.25,40.01 23,40.01 24.75,41.76 v1(27.53,41.76) ; v1(9.12,40.59) 8.69,40.16 8.64,40.16 8.13,39.65 R21.2
LPUART1_TX: length 19.4
  TOP w0.203: v1(12.1,39.4) v1(17.27,39.4) ; v1(27.64,40.94) 27.95,41.25 U5.21
  BOTTOM w0.203: v1(17.27,39.4) 22.97,39.4 24.51,40.94 v1(27.64,40.94) ; D4.CATHODE 10.81,39.4 v1(12.1,39.4)
NRST: length 21.9
  TOP w0.203: U5.7 v1(25.27,37.05) ; SW1.1 34.66,45.06 36.09,43.63 v1(36.76,43.63)
  BOTTOM w0.203: v1(25.27,37.05) 28.85,37.05 29.95,38.15 29.95,39.8 30.15,40.01 C21.1 36.77,40.97 36.76,40.98 R18.1 v1(36.76,43.63)
OSC32_IN: length 12.2
  TOP w0.203: U5.3 23.27,34.57 22.61,33.91 21.29,33.91 19.2,31.82 Y2.2 19.2,26.33 C22.1
OSC32_OUT: length 13.1
  TOP w0.203: C23.1 21.7,26.33 Y2.1 21.7,28.72 19.7,30.72 19.7,31.72 21.39,33.4 22.73,33.4 23.77,34.44 U5.4
OSC_IN: length 8.3
  TOP w0.203: C19.1 23.5,29.51 22.56,30.44 Y1.2 22.56,31.8 24.27,33.51 U5.5
OSC_OUT: length 8.3
  TOP w0.203: C20.1 25.65,29.51 26.46,30.32 Y1.1 26.46,31.8 24.77,33.49 U5.6
RESET: length 13
  TOP w0.203: U2.15 12.44,32.95 v1(12.45,32.94)
  BOTTOM w0.203: Q2.3 3.56,33.46 5.06,31.95 11.46,31.95 v1(12.45,32.94)
SIM_CLK: length 17.6
  TOP w0.203: U2.13 v1(14.68,33.02)
  BOTTOM w0.203: R12.2 1.02,28.8 3.49,31.27 11.84,31.27 13.58,33.02 v1(14.68,33.02)
SIM_DATA: length 22.7
  TOP w0.203: v1(12.85,12.45) 11.41,12.45 R10.2 ; U2.11 v1(14.74,30.82)
  BOTTOM w0.203: v1(12.85,12.45) 14.74,14.33 v1(14.74,30.82)
SIM_GND: length 36.8
  TOP w0.203: U2.10 v1(14.02,29.72) ; C11.1 v1(4.08,10.53)
  BOTTOM w0.203: 1.31,14.48 12.95,14.48 14.02,15.54 v1(14.02,29.72) ; 1.31,14.48 4.08,11.7 v1(4.08,10.53) ; 1.31,14.48 SIM1.C5
SIM_RST: length 11
  TOP w0.203: U2.12 v1(14.68,31.92)
  BOTTOM w0.203: v1(14.68,31.92) 13.5,31.92 10.34,28.76 R33.2
SIM_VCC: length 35.9
  TOP w0.203: v1(13.51,30.84) 13.54,30.87 U2.14 ; v1(7.49,15.75) 7.49,14.6 R13.1 7.56,13.5 7.49,13.43 C10.2 C11.2
  BOTTOM w0.203: v1(13.51,30.84) 10.26,27.58 10.26,15.52 9.8,15.06 8.18,15.06 v1(7.49,15.75) SIM1.C1
SPI1_MISO: length 13.8
  TOP w0.203: U5.16 31.12,38.76 v1(31.27,38.61) ; v1(35.76,30.84) 35.66,30.73 U1.12
  BOTTOM w0.203: v1(31.27,38.61) 36.41,33.46 36.41,31.49 v1(35.76,30.84)
SPI1_SCK: length 11.2
  TOP w0.203: v1(30.68,38) 30.68,38.05 30.48,38.25 U5.15 ; v1(35.79,32) U1.11
  BOTTOM w0.203: v1(35.79,32) 35.79,32.89 v1(30.68,38)
SWCLK: length 9
  TOP w0.203: U5.37 20.32,42.76 16.65,46.43 15.73,46.43 14.76,45.46 14.72,45.46 J12.5
SWDIO: length 14.3
  TOP w0.203: J12.6 13.56,46.84 16.85,46.84 18.07,45.62 22.81,45.62 23.27,45.16 U5.34
USART1_RX: length 5.3
  TOP w0.203: J12.3 18.92,39.76 U5.43
USART1_TX: length 7.2
  TOP w0.203: U5.42 19.03,40.25 17.83,41.45 17.83,43.38 J12.4
WAKEUP: length 41.9
  TOP w0.305: v1(18.54,32.38) 20.95,34.8 22.55,34.8 22.77,35.02 U5.2
  BOTTOM w0.305: v1(18.54,32.38) 17.78,31.62 17.78,20.7 19.56,18.92 19.56,16.89 18.16,15.49 18.16,4.05 18.03,3.92 18.03,3.9 17.02,2.89 ; 17.02,2.89 C33.2 18.03,2.85 18.1,2.92 SW2.2 ; 17.02,2.89 R28.2
N00780: length 8.9
  TOP w0.305: U1.2 v1(41.12,26.92) ; Q1.2 44.77,25.2 v1(46.13,25.2)
  BOTTOM w0.305: v1(41.12,26.92) 41.12,26.24 42.16,25.2 v1(46.13,25.2)
N00907: length 5
  TOP w0.305: U1.4 v1(41.1,29.46)
  BOTTOM w0.305: R5.2 R6.2 42.22,29.46 v1(41.1,29.46)
N01187: length 4.4
  TOP w0.305: U1.6 41.81,32 42.7,31.11 C3.1
N01191: length 4.1
  TOP w0.711: U1.7 41.73,33.27 C4.1 43.69,33.22 R30.2
N03977: length 13.8
  TOP w0.203: v1(3.68,18.29) 3.68,19.61 v1(5.08,21.01)
  BOTTOM w0.203: R33.1 C7.2 v1(5.08,21.01) ; SIM1.C2 1.99,18.29 1.99,18.29 v1(3.68,18.29)
N04018: length 15.3
  TOP w0.203: v1(9.45,15.85) 9.45,14.54 R13.2 9.46,13.56 9.47,13.55 R10.1 C9.2
  BOTTOM w0.203: SIM1.C7 5.74,19.56 v1(9.45,15.85)
N04137: length 8.1
  BOTTOM w0.203: SIM1.C3 1.06,25.82 1.02,25.86 R12.1 C8.2
N05893: length 5.1
  TOP w0.203: R16.2 v1(5.97,39.42)
  BOTTOM w0.203: Q2.2 4.53,36.68 R17.2 5.42,39.42 v1(5.97,39.42)
N19720: length 3.7
  TOP w0.305: v1(28.45,21.72) 29.34,22.61 30.08,22.61 Q3.1
  BOTTOM w0.305: R24.2 v1(28.45,21.72)
N19854: length 24.2
  TOP w0.254: D3.2 30,5.23 31.49,5.23 31.75,4.98 J3.1
  TOP w0.305: v1(28.45,11.18) 30.09,11.18 D2.ANODE ; R27.1 33.34,6.48 R25.1 33.2,6.48 C30.2
  TOP w0.762: C30.2 31.62,5
  TOP w1.27: C30.2 C29.2
  BOTTOM w0.305: R24.1 v1(28.45,11.18)
N20221: length 4.8
  TOP w0.254: U6.5 34.91,10.69 35.25,10.35 R26.2
  TOP w0.305: R26.2 35.18,8.44 R25.2
N20337: length 4.2
  TOP w0.254: U6.7 34.41,14.66 v1(34.87,15.11)
  BOTTOM w0.254: v1(34.87,15.11) 35.53,15.11 37.08,13.56 C31.2
N20363: length 7.7
  TOP w0.254: U6.8 33.91,15.24 v1(34.54,15.88)
  BOTTOM w0.254: R22.2 39.12,13.56 36.8,15.88 v1(34.54,15.88)
N20370: length 11.3
  TOP w0.254: v1(34.16,16.64) 33.41,15.88 U6.9
  BOTTOM w0.254: R23.2 41.15,13.56 38.07,16.64 v1(34.16,16.64)
N32203: length 4.3
  TOP w0.711: R7.2 43.69,35.11 C4.2 41.32,35.11 40.75,34.54 U1.8
N44314: length 5.2
  TOP w0.203: v1(32.26,29.18) 32.22,29.14 Q5.2
  BOTTOM w0.203: R35.1 R34.2 v1(32.26,29.18)
N62418: length 14.6
  TOP w0.254: U6.2 33.41,10.09 v1(33.4,10.08) ; D3.1 25.15,2.92 26.7,2.92 v1(28.93,5.16)
  BOTTOM w0.254: v1(28.93,5.16) 33.4,9.63 v1(33.4,10.08)
N71350: length 3.7
  TOP w1.016: J2.1 2.34,17.91 1.49,18.75 U2.35
N79431: length 10.2
  TOP w0.203: v1(20.12,15.44) 20.1,15.43 U9.3 ; R38.1 R39.1 v1(20.12,9.85)
  BOTTOM w0.203: v1(20.12,9.85) v1(20.12,15.44)
N0822037: length 6.1
  TOP w0.203: v1(22.1,37.49) 22.1,38.83 21.67,39.25 U5.44
  BOTTOM w0.203: R19.1 24.94,38.33 24.06,38.33 23.22,37.49 v1(22.1,37.49)

## Copper pours and planes (outline as drawn; the poured copper is in the pictures)
3V3 on TOP (solid shape): 18.59,17.14 15.52,16.03 15.34,16.33 15.37,17.17 18.57,17.88
3V3 on TOP (solid shape): 21.36,36.8 21.77,36.35 22.4,36.35 22.4,35.15 19.66,35.15 19.33,35.76 19.33,36.45 20.17,37.11 20.17,37.41 21.36,37.41
3V3 on TOP (solid shape): 32.16,42.55 30.84,42.55 28.68,42.62 28.68,42.93 28.97,43.63 29.67,43.92 32.16,43.92
3V3 on TOP (solid shape): 30.48,29.08 30.34,28.22 30.73,27.43 30.71,26.44 30.73,26.09 30.84,25.4 30.86,25.04 30.86,23.75 28.07,23.77 28.07,28.32
3V3 on TOP (solid shape): 15.37,15.14 15.56,14.67 16.03,14.48 16.64,14.48 17.1,14.28 17.3,13.82 17.3,13.21 14.07,13.21 14.07,15.14
3V3 on TOP (solid shape): 12.5,19.08 12.71,18.99 12.8,18.77 12.8,16.56 12.92,16.27 13.21,16.15 13.56,16.15 13.85,16.21 14.08,16.37 14.4,16.69 15.37,15.88 15.37,13.21 14.07,13.21 13.62,14.3 11.43,15.21 10.97,16.31 10.97,18.77 11.06,18.99 11.28,19.08
3V3 on BOTTOM (solid shape): 22.12,36.35 22.12,35.15 19.3,35.03 18.01,35.03 18.01,36.45 19.3,36.45 20.17,37.11 21.36,37.11
3V3 on BOTTOM (solid shape): 17.02,21.23 17.09,20.69 17.31,20.18 18.82,17.72 18.61,17.15 15.52,16.03 15.51,16.02 15.24,16.28 15.24,17.45 15.62,18.13 15.75,18.9 15.75,21.23
3V3 on BOTTOM (solid shape): 16.81,37.41 17.96,36.67 19.3,36.45 19.3,35.03 18.01,35.03 17.31,34.74 17.02,34.04 17.02,33.96 15.75,36.7
3V3_HX on TOP (solid shape): 34.92,22.96 33.53,22.96 33.53,24.28 33.45,25.32 33.45,26.01 34.95,26.01
3V3_HX on TOP (solid shape): 33.53,24.28 34.92,24.28 34.92,22.96 33.53,22.96 32.77,23.72 31.37,23.72 31.37,25.04 32.77,25.04
3V3_HX on TOP (solid shape): 32.92,25.48 32.77,25.04 32.77,23.72 31.37,23.72 31.37,25.04 31.52,25.48 31.52,26.49 32.92,26.49
GND on TOP: 10,0.25 3.11,3.11 0.25,10 0.25,40 3.11,46.89 10,49.75 40,49.75 46.89,46.89 49.75,40 49.75,10 46.89,3.11 40,0.25 ; 2 cut-outs
GND on BOTTOM: 10,0.25 3.11,3.11 0.25,10 0.25,40 3.11,46.89 10,49.75 40,49.75 46.89,46.89 49.75,40 49.75,10 46.89,3.11 40,0.25 ; 6 cut-outs
VCC on TOP (solid shape): 25.68,12.83 24.36,12.83 23.26,12.7 22.23,12.32 18.9,12.32 18.25,12.59 17.98,13.23 17.98,13.82 22.23,13.82 23.3,13.9 24.36,14.15 25.68,14.15
BAT+ on TOP (solid shape): 33.02,13.61 32.77,13.61 32.05,13.91 31.75,14.63 31.75,15.11 33.02,15.27
BAT+ on TOP (solid shape): 37.08,19.43 37.9,18.7 37.13,17.91 35.2,17.53 32.59,17.55 32.56,19.3 35.23,19.3
BAT+ on TOP (solid shape): 33.02,22.23 34.58,21.58 35.23,20.02 35.23,19.25 35.2,17.53 32.61,17.5 31.89,19.31 31.65,21.23 31.65,22.23
N19854 on TOP (solid shape): 31.38,12.11 32.02,11.68 32.77,11.53 33.02,11.53 33.02,10.82 32.88,10.33 32.14,9.63 32,9.14 32,7.85 30.58,7.85 30.61,9.17 30.6,9.2 29.96,9.65 29.21,9.88 29.21,12.52 30.96,12.52
3V3 on TOP (solid shape): 22.43,43.64 22.12,43.64 21.48,43.86 20.8,43.94 20.8,44.55 21.48,44.63 22.12,44.86 22.43,44.86
3V3 on BOTTOM (solid shape): 29.46,27.03 29.66,26.52 30.62,26.03 30.81,25.53 30.3,24.29 29.06,23.77 28.6,23.77 28.22,23.93 28.07,24.31 28.07,28.35 29.46,28.35
VIN on TOP (solid shape): 30.91,19.3 30.96,14.17 29.24,14.2 27.15,14.69 25.02,14.86 24.94,16.15 26.52,16.81 27.18,18.39 27.18,19.05 27.83,20.63 29.41,21.29 30.91,21.29

Small or netless copper shapes (teardrops, artwork), in the pictures only: 1 on TOP

## Text on the board
Ref Des/Silkscreen Top: DIO | GND | CLK | 3V3 | TX | RX | AV | B- | B+ | A+ | A- | G
TOLERANCE_TOP: FIGURE | FINISHED_SIZE | 12.01 | 31.5 | 33.46 | 38.98 | 40.0 | 51.18 | 59.0 | 125.98 | 59.06 | 118.11 | DRILL CHART: TOP to BOTTOM | ALL UNITS ARE IN MILS | TOLERANCE_DRILL | +0.0/-12.01 | +0.0/-0.0 | +2.99/-2.99 | +3.0/-3.0 | PLATED | NON-PLATED | QTY | 228 | 3 | 2 | 12 | 10 | 6 | 4 | 1
